# Altium PCB pcb_new.PcbDoc
Units mil, origin at the board's own origin, x right, y up, seen from the top; angles counter-clockwise.
Board outline 5315 x 1755 mil, 2 copper layers (Top Layer, Bottom Layer); 21 components, 27 nets, 104 pads, 0 vias.
Unrouted connection lines stored in the file: 34.
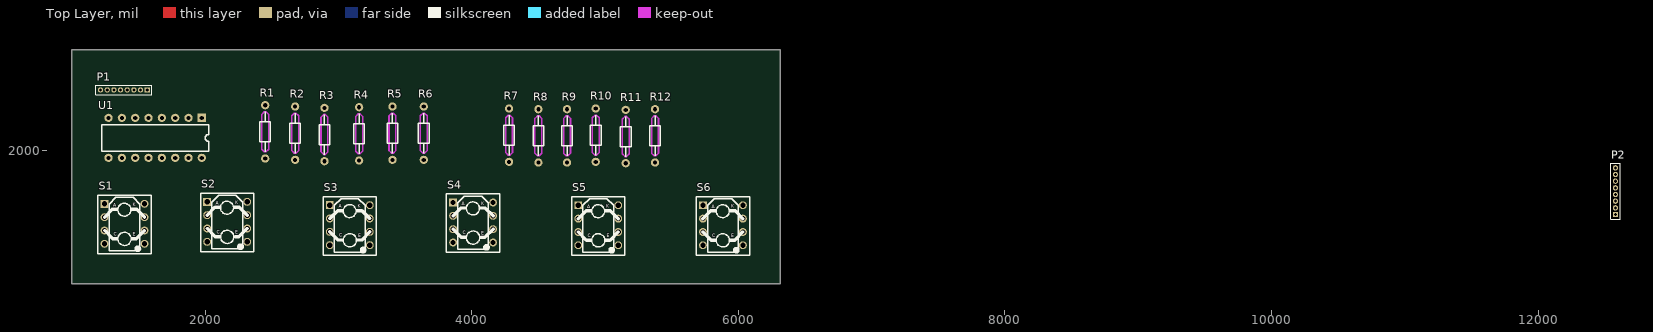
[diagram p0: Top Layer view]
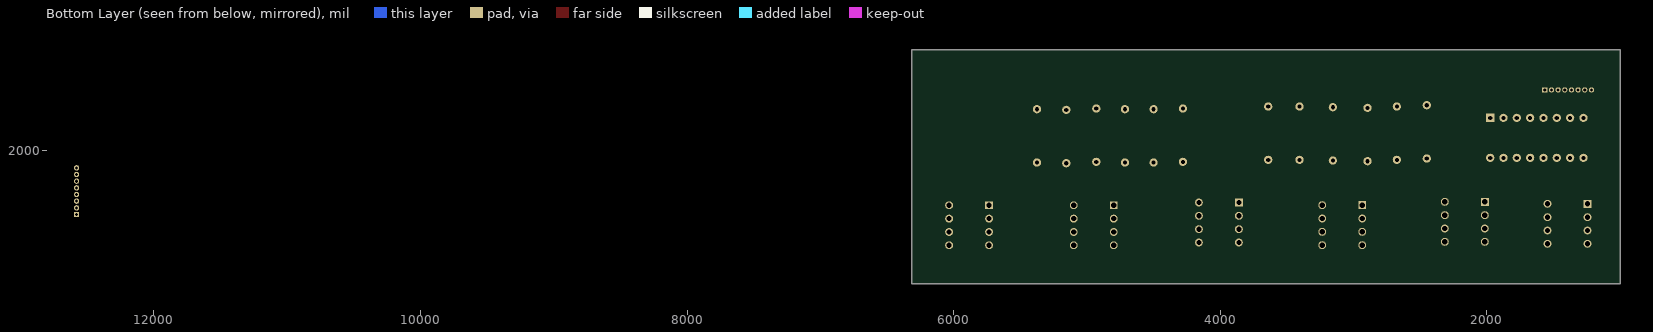
[diagram p1: Bottom Layer view, seen from below]

## Layer stack, top to bottom
Top Solder: solder mask 0.4, Solder Resist, Dk 3.5
Top Layer: signal copper 1.4
Dielectric 1: dielectric 12.6, FR-4, Dk 4.8
Bottom Layer: signal copper 1.4
Bottom Solder: solder mask 0.4, Solder Resist, Dk 3.5

## Board outline
1000,1000 6315,1000 6315,2755 1000,2755

## Design rules (kind name [scope] priority, off if disabled: settings)
Clearance [All] p1: gap=10 ignorepadtopadclearanceinfootprint=FALSE except(0: Arc-Hole Track-Hole SMDPad-Hole THPad-Hole Via-Hole Fill-Hole Poly-Hole Region-Hole Text-Hole)
PolygonConnect [All] p1: connectstyle=Relief reliefconductorwidth=10 reliefentries=4 polygonreliefangle="90 Angle" airgapwidth=10
RoutingVias [All] p1: holewidth=28 width=50 viastyle="Through Hole" minholewidth=28 minwidth=50 maxholewidth=28 maxwidth=50
SolderMaskExpansion [All] p1: expansion=4
Width [All] p1: maxlimit=10 minlimit=10 preferedwidth=10
30 further rules are at their usual default settings.

## Components (designator, comment, footprint, x,y, rotation, side; value= is the part's Value field where it differs from the comment)
P1 "MHDR1X8" MHDR1X8 1565,2455 r180 top
P2 "MHDR1X8" MHDR1X8 12580,1520 r90 top
R1 "Resistor (IO board)" RESISTOR_10K_TH_QW 2450,1940 r90 top
R2 "Resistor (IO board)" RESISTOR_10K_TH_QW 2675,1930 r90 top
R3 "Resistor (IO board)" RESISTOR_10K_TH_QW 2895,1920 r90 top
R4 "Resistor (IO board)" RESISTOR_10K_TH_QW 3155,1925 r90 top
R5 "Resistor (IO board)" RESISTOR_10K_TH_QW 3405,1930 r90 top
R6 "Resistor (IO board)" RESISTOR_10K_TH_QW 3640,1930 r90 top
R7 "Resistor (IO board)" RESISTOR_10K_TH_QW 4280,1915 r90 top
R8 "Resistor (IO board)" RESISTOR_10K_TH_QW 4500,1910 r90 top
R9 "Resistor (IO board)" RESISTOR_10K_TH_QW 4715,1910 r90 top
R10 "Resistor (IO board)" RESISTOR_10K_TH_QW 4930,1915 r90 top
R11 "Resistor (IO board)" RESISTOR_10K_TH_QW 5155,1905 r90 top
R12 "Resistor (IO board)" RESISTOR_10K_TH_QW 5375,1910 r90 top
S1 "TCRT5000(On PCB)" "TCRT5000 Breakout" 1315.83,1525.83 r0 top
S2 "TCRT5000(On PCB)" "TCRT5000 Breakout" 2085.83,1540.83 r0 top
S3 "TCRT5000(On PCB)" "TCRT5000 Breakout" 3005.83,1515.83 r0 top
S4 "TCRT5000(On PCB)" "TCRT5000 Breakout" 3930.83,1535.83 r0 top
S5 "TCRT5000(On PCB)" "TCRT5000 Breakout" 4870,1515 r0 top
S6 "TCRT5000(On PCB)" "TCRT5000 Breakout" 5805,1515 r0 top
U1 "ULN2003" "DILP-16(300) - 3D" 1975,2245 r270 top

## Footprints (in the part's own frame and the unit in brackets; to place one, negate y for a bottom-side part, rotate by r counter-clockwise, add the part's x,y. Pads: shape width x height; smd on the part's side, far side on the other; paste and mask are expansions set on the pad)
"DILP-16(300) - 3D" [mil]
  rect 62x62 hole 31.5: 1(0,0)
  round 62 hole 31.5: 2(0,-100) 3(0,-200) 4(0,-300) 5(0,-400) 6(0,-500) 7(0,-600) 8(0,-700) 9(300,-700) 10(300,-600) 11(300,-500) 12(300,-400) 13(300,-300) 14(300,-200) 15(300,-100) 16(300,0)
  silkscreen extent 50,-750 250,50, body extent -4,-789 306,53, height 200
MHDR1X8 [mm] "Connector; Header; 8 Position"
  rect 1x1 hole 0.6: 1(0,0)
  round 1 hole 0.6: 2(1.27,0) 3(2.54,0) 4(3.81,0) 5(5.08,0) 6(6.35,0) 7(7.62,0) 8(8.89,0)
  silkscreen extent -0.9,-0.9 9.79,0.9
RESISTOR_10K_TH_QW [mil]
  round 62 hole 31.5: 1(0,0) 2(400,0)
  Top Layer keep-out lines w12: 70,26 330,26 350,6 350,-6 330,-26 70,-26 50,-6 50,6 70,26
  silkscreen extent 50,-40 350,40, body extent -12,-49 412,51, height 103
"TCRT5000 Breakout" [mm]
  rect 1.5x1.5 hole 1: 1(-1.799,1.884)
  round 1.5 hole 1: 2(-1.799,-0.656) 3(-1.799,-3.196) 4(-1.799,-5.736) 5(5.821,-5.736) 6(5.821,-3.196) 7(5.821,-0.656) 8(5.821,1.884)
  silkscreen extent -3.07,-7.64 7.09,3.54, body extent -3.09,-7.41 7.09,3.77, height 10.11

## Part data
P1 P2: "Header, 8-Pin", LatestRevisionDate=17-Jul-2002, LatestRevisionNote="Re-released for DXP Platform.", Publisher="Altium Limited"
R1 R2 R3 R4 R5 R6 R7 R8 R9 R10 R11 R12: library part "Resistor(IO board)", "Resistor (SFR25)"
  R1 R2 R3 R4 R5 R6: =66.8
  R7 R8 R9 R10 R11 R12: =10k
S1 S3: "4-Pin Phototransistor Optocoupler", Supplier Part Number 1=1470066, DatasheetVersion=Nov-2003, LatestRevisionDate=04-Mar-2005, LatestRevisionNote="Sch pins 3 & 4 Swapped.", PackageReference=DIP-4, Published=24-Mar-1999, Publisher="Altium Limited", Supplier 1=Farnell
S2 S4 S5 S6: "4-Pin Phototransistor Optocoupler", DatasheetVersion=Nov-2003, LatestRevisionDate=04-Mar-2005, LatestRevisionNote="Sch pins 3 & 4 Swapped.", PackageReference=DIP-4, Published=24-Mar-1999, Publisher="Altium Limited"
U1: "Darlington Transistor Array", Supplier Part Number 1=1470512, Supplier 1=Farnell

## Nets (pads, with @x,y where several pads share a name; then routed paths per layer and width w, separated by ;. In a path a pad name is that pad's centre, name@x,y a point inside that pad or via, vN(x,y) a via of type N, cw(c..) or ccw(c..) an arc to the next point about the centre after c; other vN are vias at no path point)
GND: R7.2 R8.2 R9.2 R10.2 R11.2 R12.2 U1.8
NetP1_5V: R1.1 R2.1 R3.1 R4.1 R5.1 R6.1
NetP1_Sensor1: U1.1
NetP1_Sensor2: U1.2
NetP1_Sensor3: U1.3
NetP1_Sensor4: U1.4
NetP1_Sensor5: U1.5
NetP1_Sensor6: U1.6
NetP2_5V: S1.3 S2.3 S3.3 S4.3 S5.3 S6.3
NetP2_Output1: R7.1 S1.6
NetP2_Output2: R8.1 S2.6
NetP2_Output3: R9.1 S3.6
NetP2_Output4: R10.1 S4.6
NetP2_Output5: R11.1 S5.6
NetP2_Output6: R12.1 S6.6
NetR1_2: R1.2 S1.2
NetR2_2: R2.2 S2.2
NetR3_2: R3.2 S3.2
NetR4_2: R4.2 S4.2
NetR5_2: R5.2 S5.2
NetR6_2: R6.2 S6.2
NetS1_2: S1.7 U1.16
NetS2_2: S2.7 U1.15
NetS3_2: S3.7 U1.14
NetS4_2: S4.7 U1.13
NetS5_2: S5.7 U1.12
NetS6_2: S6.7 U1.11
pads on no net: P1.1 P1.2 P1.3 P1.4 P1.5 P1.6 P1.7 P1.8 P2.1 P2.2 P2.3 P2.4 P2.5 P2.6 P2.7 P2.8 S1.1 S1.4 S1.5 S1.8 S2.1 S2.4 S2.5 S2.8 S3.1 S3.4 S3.5 S3.8 S4.1 S4.4 S4.5 S4.8 S5.1 S5.4 S5.5 S5.8 S6.1 S6.4 S6.5 S6.8 U1.7 U1.9 U1.10

## Text inside footprints (layer, text, board x,y; h text height)
S1: Top Overlay "A" at 1310.83,1578.83 h25; Top Overlay "K" at 1455.83,1580.83 h25; Top Overlay "C" at 1315.83,1361.83 h25; Top Overlay "E" at 1456.83,1359.83 h25
S2: Top Overlay "A" at 2080.83,1593.83 h25; Top Overlay "K" at 2225.83,1595.83 h25; Top Overlay "C" at 2085.83,1376.83 h25; Top Overlay "E" at 2226.83,1374.83 h25
S3: Top Overlay "A" at 3000.83,1568.83 h25; Top Overlay "K" at 3145.83,1570.83 h25; Top Overlay "C" at 3005.83,1351.83 h25; Top Overlay "E" at 3146.83,1349.83 h25
S4: Top Overlay "A" at 3925.83,1588.83 h25; Top Overlay "K" at 4070.83,1590.83 h25; Top Overlay "C" at 3930.83,1371.83 h25; Top Overlay "E" at 4071.83,1369.83 h25
S5: Top Overlay "A" at 4865,1568 h25; Top Overlay "K" at 5010,1570 h25; Top Overlay "C" at 4870,1351 h25; Top Overlay "E" at 5011,1349 h25
S6: Top Overlay "A" at 5800,1568 h25; Top Overlay "K" at 5945,1570 h25; Top Overlay "C" at 5805,1351 h25; Top Overlay "E" at 5946,1349 h25